# Altium PCB PCB1.PcbDoc
Units mil, origin at the board's own origin, x right, y up, seen from the top; angles counter-clockwise.
Board outline 6000 x 4000 mil, 2 copper layers (Top Layer, Bottom Layer); 34 components, 34 nets, 117 pads, 26 vias.
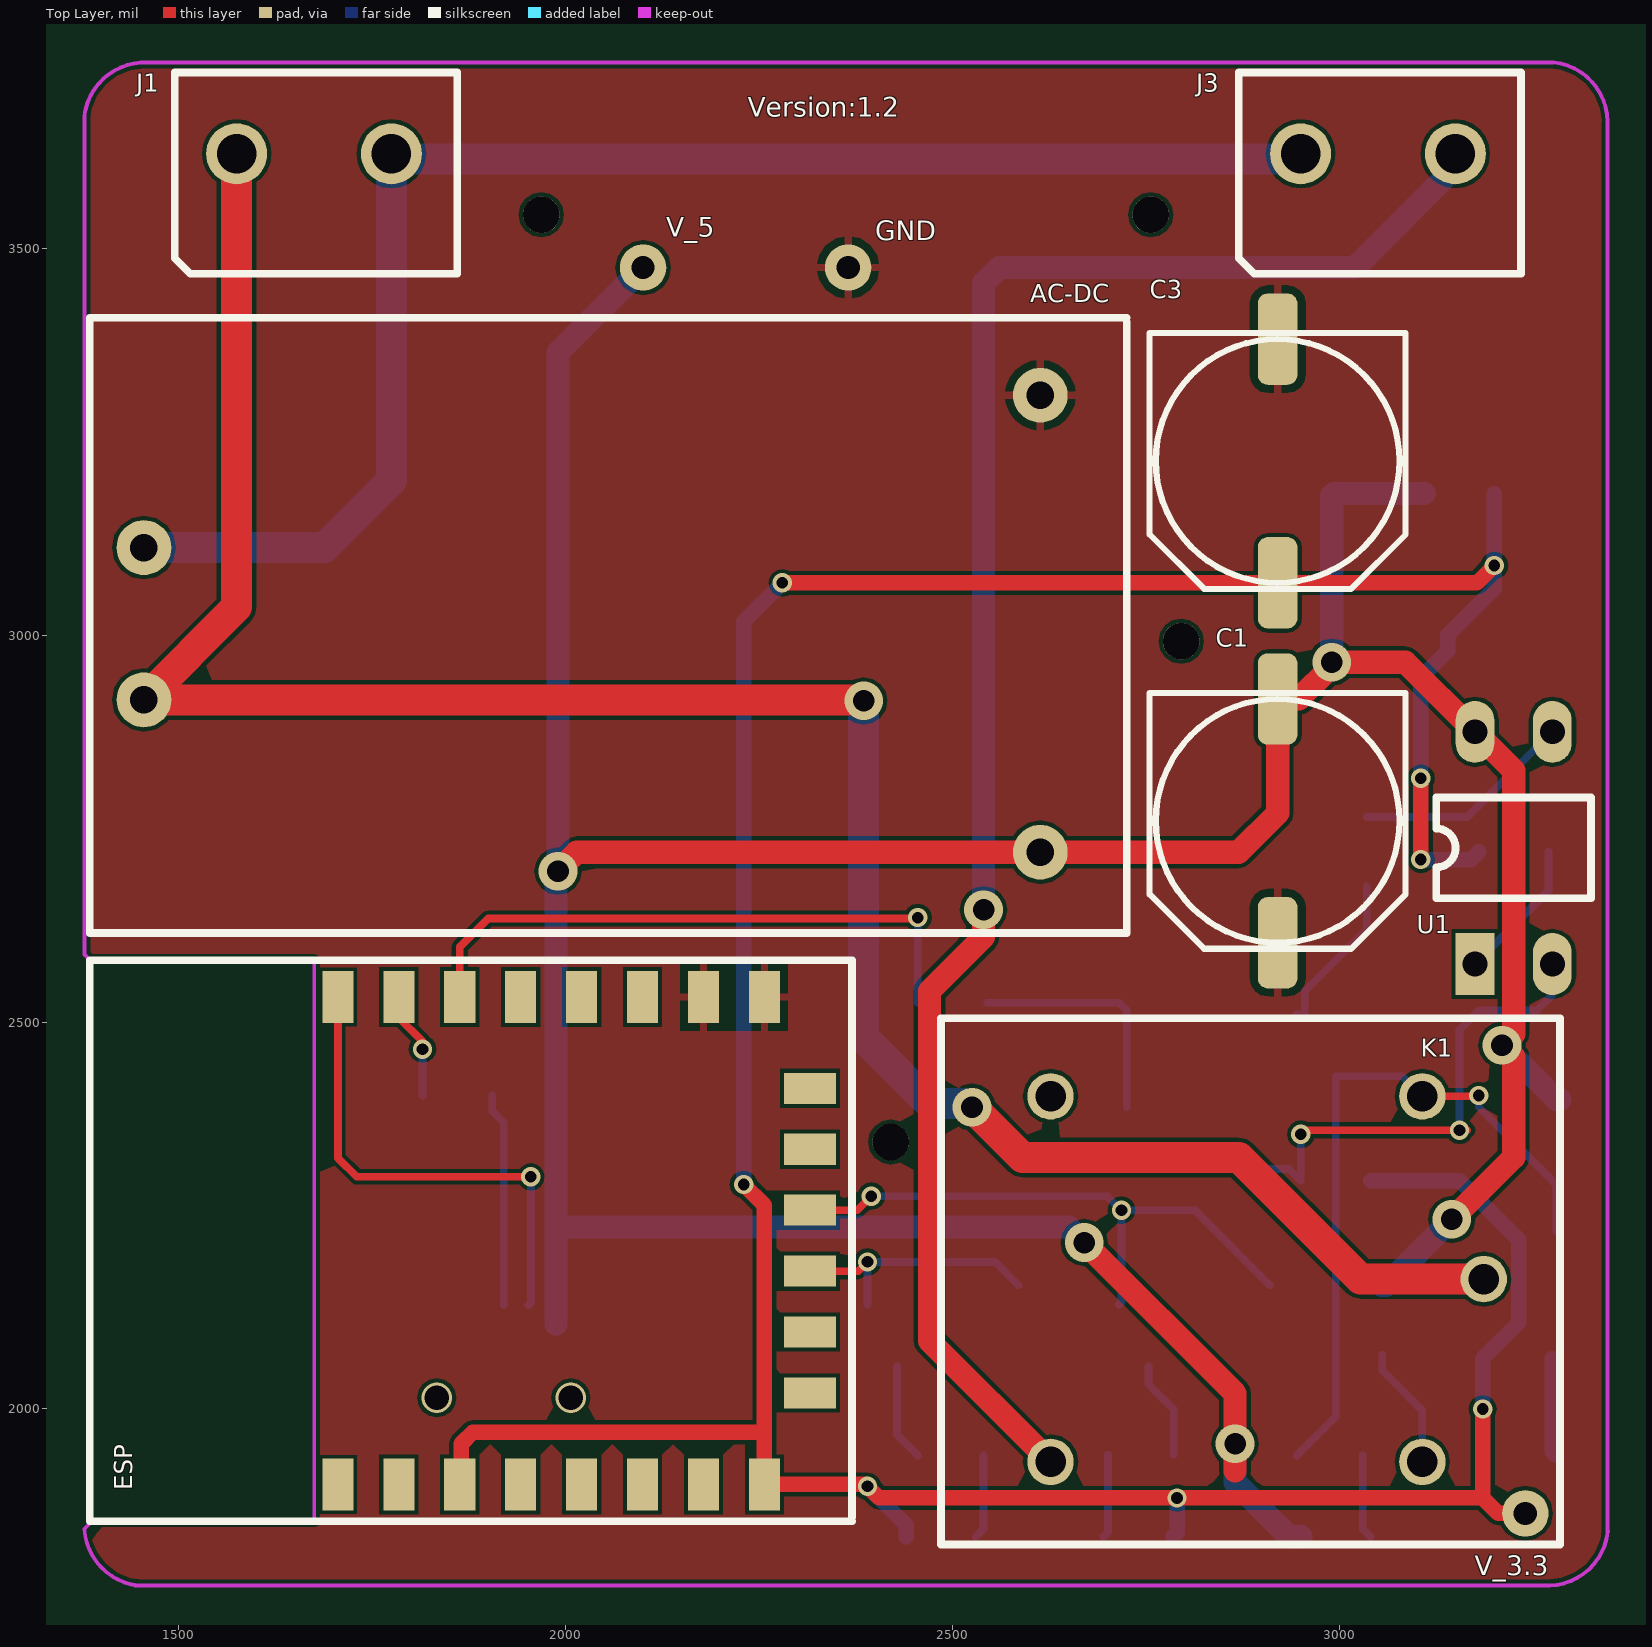
[diagram p0: Top Layer view]
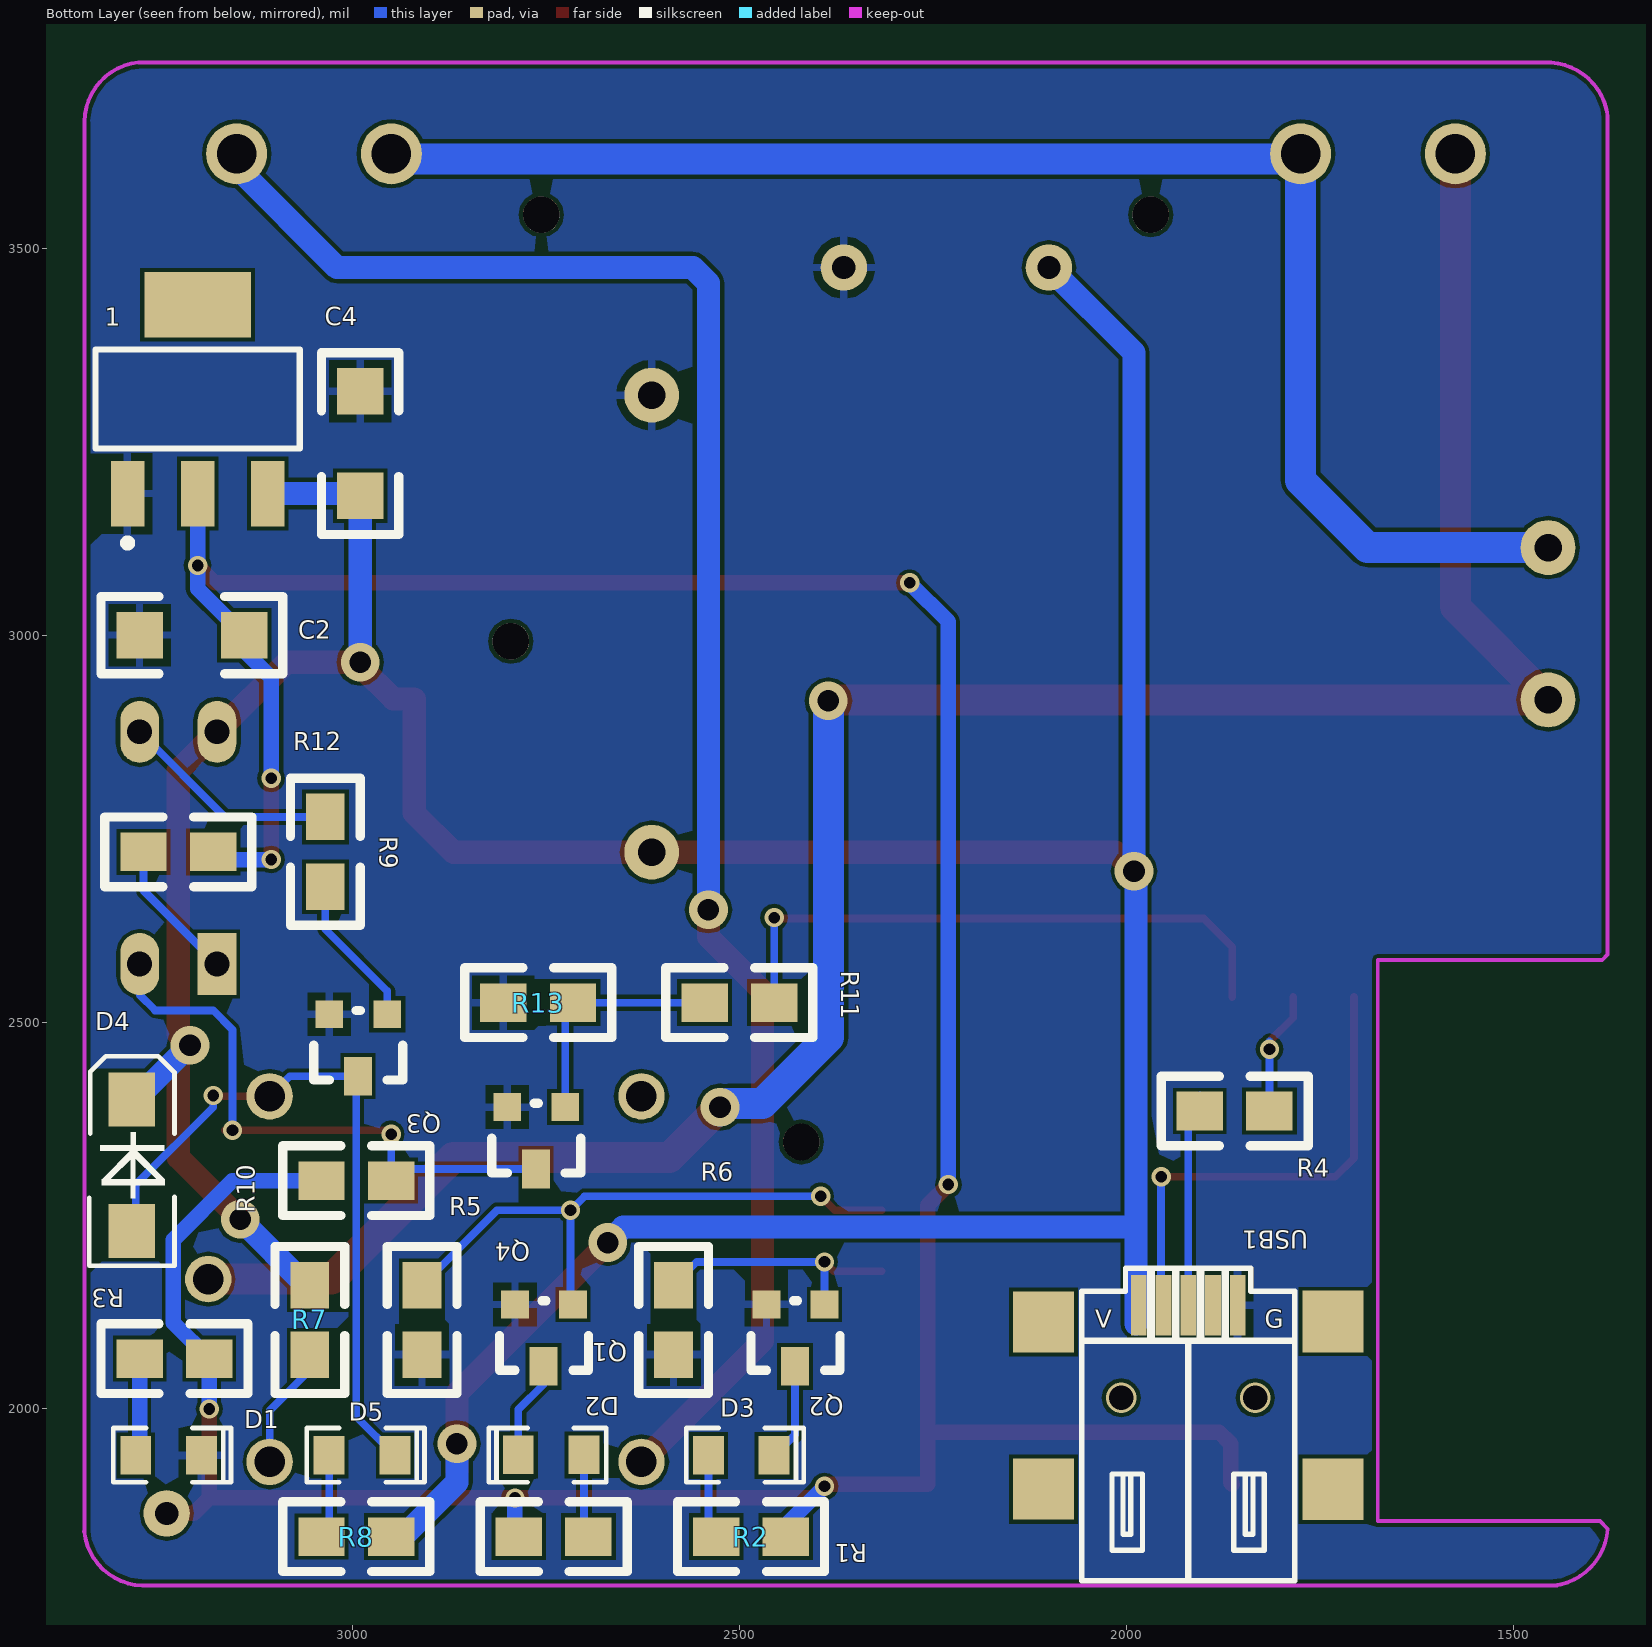
[diagram p1: Bottom Layer view, seen from below]

## Layer stack, top to bottom
Top Solder: solder mask 0.4, Solder Resist, Dk 3.5
Top Layer: signal copper 1.4
Dielectric 1: dielectric 12.6, FR-4, Dk 4.8
Bottom Layer: signal copper 1.4
Bottom Solder: solder mask 0.4, Solder Resist, Dk 3.5

## Board outline
1000,1000 7000,1000 7000,5000 1000,5000

## Design rules (kind name [scope] priority, off if disabled: settings)
Clearance [All] p1: gap=5
PolygonConnect [All] p1: connectstyle=Relief reliefconductorwidth=10 reliefentries=4 polygonreliefangle="90 Angle" airgapwidth=10
RoutingVias [All] p1: holewidth=28 width=50 viastyle="Through Hole" minholewidth=10 minwidth=20 maxholewidth=28 maxwidth=50
SilkToSilkClearance [All] p1: silktosilkclearance=4
SilkToSolderMaskClearance [IsPad] p1: minsilkscreentomaskgap=5 clearancetoexposedcopper=TRUE
SolderMaskExpansion [All] p1: expansion=4
Width [All] p1: maxlimit=50 minlimit=10 preferedwidth=10
27 further rules are at their usual default settings.

## Components (designator, comment, footprint, x,y, rotation, side; value= is the part's Value field where it differs from the comment)
1 "AMS1117" SOT223 3200,3305 r180 bottom
AC-DC "220—5" POWER-220_5 2050,3025 r0 top (schematic designator AC-DC1)
C1 "Cap" "CAP-E SMD 8X8" 2920,2760 r90 top
C2 "Cap" 1206 3140,3000 r0 bottom
C3 "Cap Pol1" "CAP-E SMD 8X8" 2920,3225 r90 top
C4 "Cap" 1206 2990,3180 r90 bottom
D1 "LED0" LED0805 3280,1940 r180 bottom
D2 "LED0" LED0805 2700.71,1940.79 r0 bottom
D3 "LED0" LED0805 2540,1940 r180 bottom
D4 "1N5819" DO-214AC/SMA 3285,2315 r90 bottom
D5 "LED1" LED0805 3030,1940 r180 bottom
ESP "ESP8266-12E" ESP8266 1745,2060 r90 top (schematic designator ESP1)
J1 "CON2" TML-2-5.08 1884.8,3146.97 r180 top
J3 "CON2" TML-2-5.08 3259.61,3146.97 r180 top
K1 "Relay-SPDT" 5V-5 3145,2345 r270 top
Q1 "SS8050" SOT-23 2715,2135 r0 bottom
Q2 "SS8050" SOT-23 2390,2135 r0 bottom
Q3 "SS8050" SOT-23 2955,2510 r0 bottom
Q4 "SS8050" SOT-23 2725,2390 r0 bottom
R1 "Res" 0805 2785,1835 r180 bottom
R2 "Res" 0805 2440,1835 r0 bottom
R3 "Res" 0805 3275,2065 r180 bottom
R4 "Res" 0805 1815,2385 r0 bottom
R5 "Res" 0805 2910,2070 r90 bottom
R6 "Res" 0805 2585,2070 r90 bottom
R7 "Res" 0805 3055,2070 r90 bottom
R8 "Res" 0805 2950,1835 r0 bottom
R9 "Res" 0805 3270,2720 r180 bottom
R10 "Res" 0805 2950,2295 r0 bottom
R11 "Res" 0805 2545,2525 r180 bottom
R12 "Res" 0805 3035,2675 r90 bottom
R13 "Res" 0805 2805,2525 r180 bottom
U1 "Optoisolator1" DIP4 3175,2575 r90 top
USB1 "USB" USB-MINI 1920,1970 r180 bottom

## Footprints (in the part's own frame and the unit in brackets; to place one, negate y for a bottom-side part, rotate by r counter-clockwise, add the part's x,y. Pads: shape width x height; smd on the part's side, far side on the other; paste and mask are expansions set on the pad)
5V-5 [mm]
  round 1.524 hole 1: 1(4.5,1.05) 2(-1.5,-0.965) 3(10.5,-0.965) 4(-1.5,-13.17) 5(10.5,-13.17)
  silkscreen extent -4.06,-16.76 13.21,3.56
0805 [mil]
  rect 60x50 smd: 1(0,0) 2(90,0)
  silkscreen extent -50,-45 140,45
1206 [mil]
  rect 60x60 smd: 1(0,0) 2(135,0)
  silkscreen extent -50,-50 185,50
"CAP-E SMD 8X8" [mm]
  rrect50% 3x1.3 smd: 1(-4,0) 2(4,0)
  silkscreen extent -4.2,-4.2 4.2,4.2, body extent -4.52,-4.22 4.48,4.08, height 10.5
DIP4 [mil]
  rect 80x50 hole 32: 1(0,0)
  oval 80x50 hole 32: 2(0,-100) 3(300,-100) 4(300,0)
  silkscreen extent 85,-150 215,50
DO-214AC/SMA [mil]
  rect 70x60 smd: 1(-85,0) 2(85,0)
  silkscreen extent -130,-55 141,55
ESP8266 [mm]
  rect 1.7x1.02 smd: 1(-4,1) 2(-4,-1) 3(-4,-3) 4(-4,-5) 5(-4,-7) 6(-4,-9) 7(-4,-11) 8(-4,-13) 15(12,-13) 16(12,-11) 17(12,-9) 18(12,-7) 19(12,-5) 20(12,-3) 21(12,-1) 22(12,1)
  rect 1.02x1.7 smd: 9(-1,-14.5) 10(1,-14.5) 11(3,-14.5) 12(5,-14.5) 13(7,-14.5) 14(9,-14.5)
  silkscreen extent -5.21,-15.88 13.21,9.14
LED0805 [mil]
  rect 40x50 smd: 1(0,0) 2(85,0)
  silkscreen extent -29,-35 123,35, body extent 3,-24 83,25, height 43
POWER-220_5 [mm]
  round 1.8 hole 0.9: 1(-15.113,-2.762) 2(-15.113,2.238) 3(14.307,-7.762) 4(14.307,7.238)
  silkscreen extent -16.89,-10.41 17.14,9.78
SOT223 [mm] "SOT-223/SC-73; 4 Leads; Body 6.7 x 7.3 mm, inc. leads (LxW max)"
  rect 1.1x2.15 smd: 1(-2.3,-3.1) 2(0,-3.1) 3(2.3,-3.1)
  rect 3.5x2.15 smd: 4(0,3.1)
  silkscreen extent -3.35,-4.85 3.35,1.63
SOT-23 [mil]
  rect 36x36 smd: 1(0,0) 2(75,0)
  rect 36x50 smd: 3(38,80)
  silkscreen extent -20,-5 95,85
TML-2-5.08 [mm]
  round 2 hole 1.3: 1(2.794,-12.065) 2(7.874,-12.065)
  silkscreen extent 0.64,-14.73 9.91,-8.13
USB-MINI [mm]
  rect 2x2 smd: 0(-4.746,-1.872) 0(-4.746,3.612)
  round 1 hole 0.8: 0(-2.2,1.128) 0(2.2,1.128)
  rect 2x2.032 smd: 0(4.746,-1.872) 0(4.746,3.628)
  rect 0.52x2 smd: 1(-1.626,4.166) 2(-0.813,4.166) 3(0,4.166) 4(0.813,4.166) 5(1.626,4.166)
  silkscreen extent -3.5,-4.87 3.5,5.38, body extent -5.32,-4.63 5.38,4.57, height 3.95

## Part data
C1 C2 C4: "Capacitor"
C3: "Polarized Capacitor (Radial)"
D1 D2 D3: "Typical INFRARED GaAs LED"
D4: library part Diode, "Default Diode"
D5: "Typical RED GaAs LED"
ESP: library part ESP8266
J1 J3: "Connector"
K1: "Single-Pole Dual-Throw Relay"
Q1 Q2 Q3 Q4: library part 2N3904, "NPN General Purpose Amplifier"
R1 R2 R3 R4 R5 R6 R7 R8 R9 R10 R11 R12 R13: "Resistor"
U1: "4-Pin Phototransistor Optocoupler"
USB1: library part miniUSB-b

## Free pads (board coordinates)
  round 47.24 hole 47.24: 0(1968.5,3543.15) 0(2420,2345) 0(2755.91,3543.15) 0(2795.28,2992.13)
  round 60 hole 30: 0(3240,1865) 1(2100,3475) 2(2365,3475)

## Via types
v1: diameter 25, hole 15, Top Layer to Bottom Layer, 17 vias
v2: diameter 50, hole 28, Top Layer to Bottom Layer, 9 vias

## Nets (pads, with @x,y where several pads share a name; then routed paths per layer and width w, separated by ;. In a path a pad name is that pad's centre, name@x,y a point inside that pad or via, vN(x,y) a via of type N, cw(c..) or ccw(c..) an arc to the next point about the centre after c; other vN are vias at no path point)
220L: AC-DC.1 J1.2 K1.1 | length 3058
  Top Layer w40: J1.2 1574.8,3036.06 AC-DC.1 v2@2385,2916.26 ; v2(2525,2390) 2590,2325 2870,2325 3027.17,2167.83 K1.1
  Bottom Layer w40: v2(2385,2915) 2385,2480 2470,2395 2515,2395 2525,2385 v2(2525,2390)
220L_OUT: J3.1 K1.5 | length 2306.1
  Top Layer w30: v2(2540,2645) 2540,2610 2470,2540 2470,2088.11 K1.5
  Bottom Layer w30: v2(2540,2645) 2540,3455 2560,3475 3020,3475 3149.61,3604.61 J3.1
220N: AC-DC.2 J1.1 J3.2 | length 1945.6
  Bottom Layer w40: AC-DC.2 1688.11,3113.11 1775,3200 1775,3615 J3.2@2949.61,3615
ADC: ESP.2
GND: 1.1 AC-DC.4 C1.1 C2.2 C3.2 C4.2 D1.2 ESP.15 ESP.16 pad.2 Q1.2 Q2.2 Q3.2 Q4.2 R5.1 R6.1 R13.1 USB1.5
IO0: ESP.18
IO2: ESP.17
IO4: ESP.19
IO5: ESP.20 R11.2 | length 782.1
  Top Layer w10: ESP.20 1863.11,2596.89 1900,2633.78 2453.78,2633.78 v1(2455,2635)
  Bottom Layer w10: R11.2 v1(2455,2635)
IO9: ESP.11 Q2.1 R6.2 | length 341.5
  Top Layer w10: ESP.11 2378.11,2178.11 v1(2390,2190)
  Bottom Layer w10: Q2.1 v1(2390,2190) 2555,2190 R6.2
IO10: ESP.12 Q1.1 R5.2 | length 772.4
  Top Layer w10: ESP.12 2376.85,2256.85 v1(2395,2275)
  Bottom Layer w10: v1(2395,2275) 2700,2275 v1(2718.15,2256.85) ; Q1.1 2718.15,2138.15 v1(2718.15,2256.85) ; R5.2 2813.15,2256.85 v1(2718.15,2256.85)
IO12: ESP.6
IO13: ESP.7
IO14: ESP.5
IO16: ESP.4
NetD1_1: D1.1 R3.1 | length 127.1
  Bottom Layer w20: R3.1 3275,1945 D1.1
NetD2_1: D2.1 R1.2 | length 108.2
  Bottom Layer w10: R1.2 2700.71,1840.71 D2.1
NetD2_2: D2.2 Q1.3 | length 127.8
  Bottom Layer w10: Q1.3 2753,2032 2785.71,1999.29 D2.2
NetD3_1: D3.1 R2.2 | length 109.1
  Bottom Layer w10: R2.2 2540,1845 D3.1
NetD3_2: D3.2 Q2.3 | length 126.2
  Bottom Layer w10: Q2.3 2428,1967 D3.2
NetD4_1: D4.1 D5.2 K1.2 Q3.3 | length 923.3
  Top Layer w10: K1.2 3179.06,2404.06 v1(3180,2405)
  Bottom Layer w10: D5.2 2995,1990 2995,2430 3081.06,2430 K1.2 ; v1(3180,2405) 3180,2390 3280,2290 D4.1@3280,2230
NetD5_1: D5.1 R8.2 | length 109.1
  Bottom Layer w10: D5.1 3030,1845 R8.2
NetESP1_21: ESP.21 R4.1 | length 160.1
  Top Layer w10: ESP.21 1784.37,2505.63 1815,2475 v1(1815,2465)
  Bottom Layer w10: R4.1@1815,2405 1815,2475 v1(1815,2465)
NetK1_4: K1.3 R7.1 | length 159.9
  Bottom Layer w10: R7.1 3055,2050 3107.01,1997.99 K1.3
NetQ3_2: Q3.1 R12.1 | length 208.1
  Bottom Layer w10: Q3.1@2945,2510 Q3.1 2955,2540 3035,2620 R12.1
NetQ4_2: Q4.1 R11.1 R13.2 | length 309.1
  Bottom Layer w10: R11.1 R13.2 2725,2515 Q4.1
NetQ4_3: Q4.3 R10.1 U1.2 | length 778.9
  Top Layer w10: v1(2950,2355) 2955,2360 v1@3165,2360
  Bottom Layer w10: Q4.3 2935,2310 R10.1 v1(2950,2355) ; v1(3155,2360) 3155,2490 3180,2515 3255,2515 3275,2535 U1.2
NetR9_1: R9.1 U1.1 | length 184.4
  Bottom Layer w10: U1.1 3270,2670 R9.1
NetR12_2: R12.2 U1.3 | length 285.6
  Bottom Layer w10: R12.2 3165,2765 U1.3
RST: ESP.1
RXD: R4.2 USB1.3 | length 277.2
  Bottom Layer w10: R4.2@1905,2405 R4.2 1920,2370 USB1.3
TXD: ESP.22 USB1.2 | length 634.8
  Top Layer w10: ESP.22 1705.63,2324.37 1730,2300 v1(1955,2300)
  Bottom Layer w10: USB1.2 1955,2137 v1(1955,2300)
VCC_3.3V: 1.2 C2.1 C3.1 ESP.3 ESP.8 pad.0@3240,1865 R1.1 R2.1 R3.2 R9.2 R10.2 | length 4884
  Top Layer w20: ESP.3 1865,1904.41 1865,1955 1880,1970 2250,1970 2256.81,1963.19 ; v1(2230,2290) 2256.81,2263.19 ESP.8 2387.48,1902.52 v1(2390,1900) 2405,1885 v1(2790,1885) 3185,1885 ; v1(2280,3067.52) C3.1 3177.52,3067.52 v1(3200,3090) ; v1(3105,2710) v1(3105,2815) ; v1(3185,2000) 3185,1885 ; pad.0@3240,1865 3205,1865 3185,1885
  Bottom Layer w20: v1(2230,2290) 2230,3017.52 v1(2280,3067.52) ; v1(2390,1900) 2440,1850 R2.1 ; R1.1 2790,1840 v1(2790,1885) ; R10.2 3155,2295 3231.34,2218.66 3231.34,2111.34 R3.2 v1(3185,2000) ; v1(3105,2710) 3170,2710 R9.2 ; v1(3105,2815) 3105,2945 3140,2980 C2.1 3200,3060 v1(3200,3090) 1.2
VCC_5V: 1.3 AC-DC.3 C1.2 C4.1 D4.2 pad.1 R7.2 R8.1 U1.4 USB1.1 | length 5326.7
  Top Layer w30: v2(1990,2695) 2014.41,2719.41 AC-DC.3 2869.41,2719.41 2920,2770 C1.2 2947.48,2917.48 2990,2960 v2(2990,2965) 3085,2965 U1.4 3225,2825 3225,2485 v2(3210,2470) 3225,2455 3225,2325 v2(3145,2245) ; v2(2670,2215) 2865,2020 2865,1920
  Bottom Layer w30: USB1.1@1987.5,2110 1987.5,2235 ; pad.1 1990,3365 v2(1990,2695) 1987.5,2692.5 1987.5,2235 ; v2(2670,2215) 2650,2235 1987.5,2235 ; v2(2865,1955) 2865,1905 2935,1835 R8.1 ; v2(2990,2965) C4.1 2992.95,3182.95 1.3 ; R7.2 3060,2160 v2(3145,2245) ; v2(3210,2470) 3280,2400 D4.2
pads on no net: 1.4 ESP.9 ESP.10 ESP.13 ESP.14 K1.4 USB1.0 USB1.4

## Polygon pours and split planes (outlines as drawn)
GND on Top Layer "Top Layer" (solid, remove dead copper, pour order 4): 1330,3770 1355,3745 3420,3745 3420,1785 3460,1745 3455,1750 1365,1750
GND on Bottom Layer "Top Layer" (solid, remove dead copper, pour order 6): 1355,3755 3365,3755 3380,3770 3400,3750 3400,1735 1315,1735 1305,1725

## Keep-outs
Keep-Out Layer:
  lines w5: 1443.35,1771.65 3271.65,1771.65 ccw(c3268.4,1850.33) 3346.66,1841.61 ; 1447.82,1771.74 cw(c1456.53,1850) 1377.95,1845 1380.45,1847.5 1385.45,1852.5 1387.95,1855 1675,1855 1675,2580 1385,2580 1377.95,2587.05 1377.95,3670 cw(c1456.21,3661.28) 1451.21,3739.86 ; 1451.21,3740.16 3276.45,3740.16 ; 3276.45,3740.28 cw(c3267.73,3662.03) 3346.46,3663.54 3346.46,1841.61

## Silkscreen, mask and mechanical layers (free items; w line width, h text height)
Top Overlay:
  text "Version:1.2" at 2235,3670 h25
  text "V_5" at 2130,3515 h25
  text "GND" at 2400,3510 h25
  text "V_3.3" at 3175,1785 h25

## Text inside footprints (layer, text, board x,y; h text height)
USB1: Bottom Overlay "G" at 1821,2105 h23; Bottom Overlay "V" at 2040,2105 h23